# Altium PCB PCB1.PcbDoc
Units mil, origin at the board's own origin, x right, y up, seen from the top; angles counter-clockwise.
Board outline 6000 x 4000 mil, 2 copper layers (Top Layer, Bottom Layer); 10 components, 6 nets, 40 pads, 0 vias.
Unrouted connection lines stored in the file: 34.
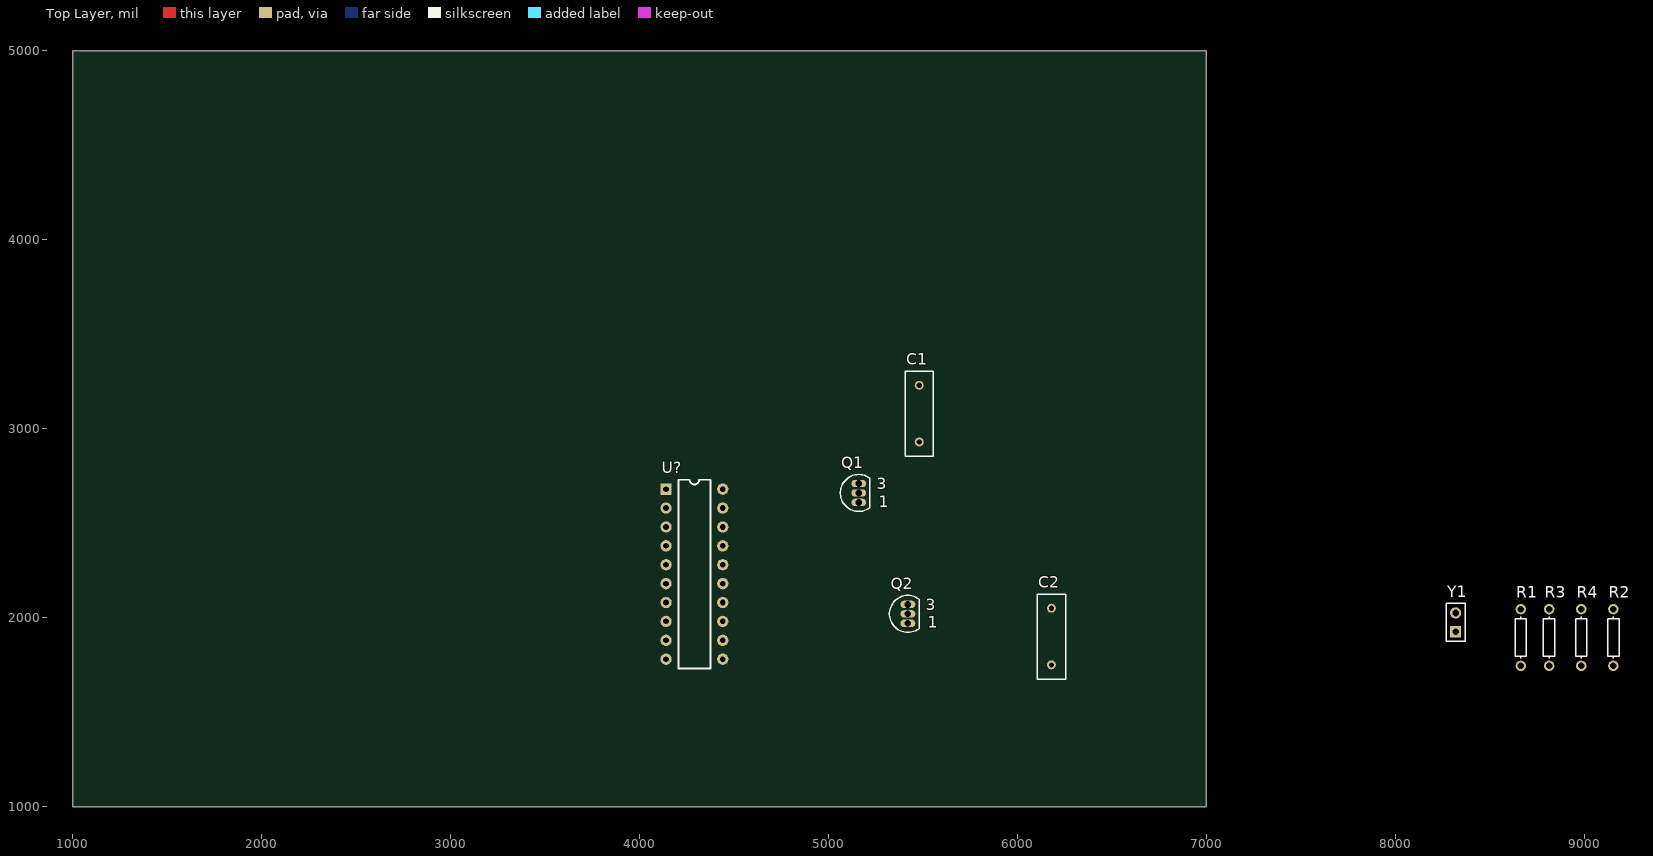
[diagram p0: Top Layer view]
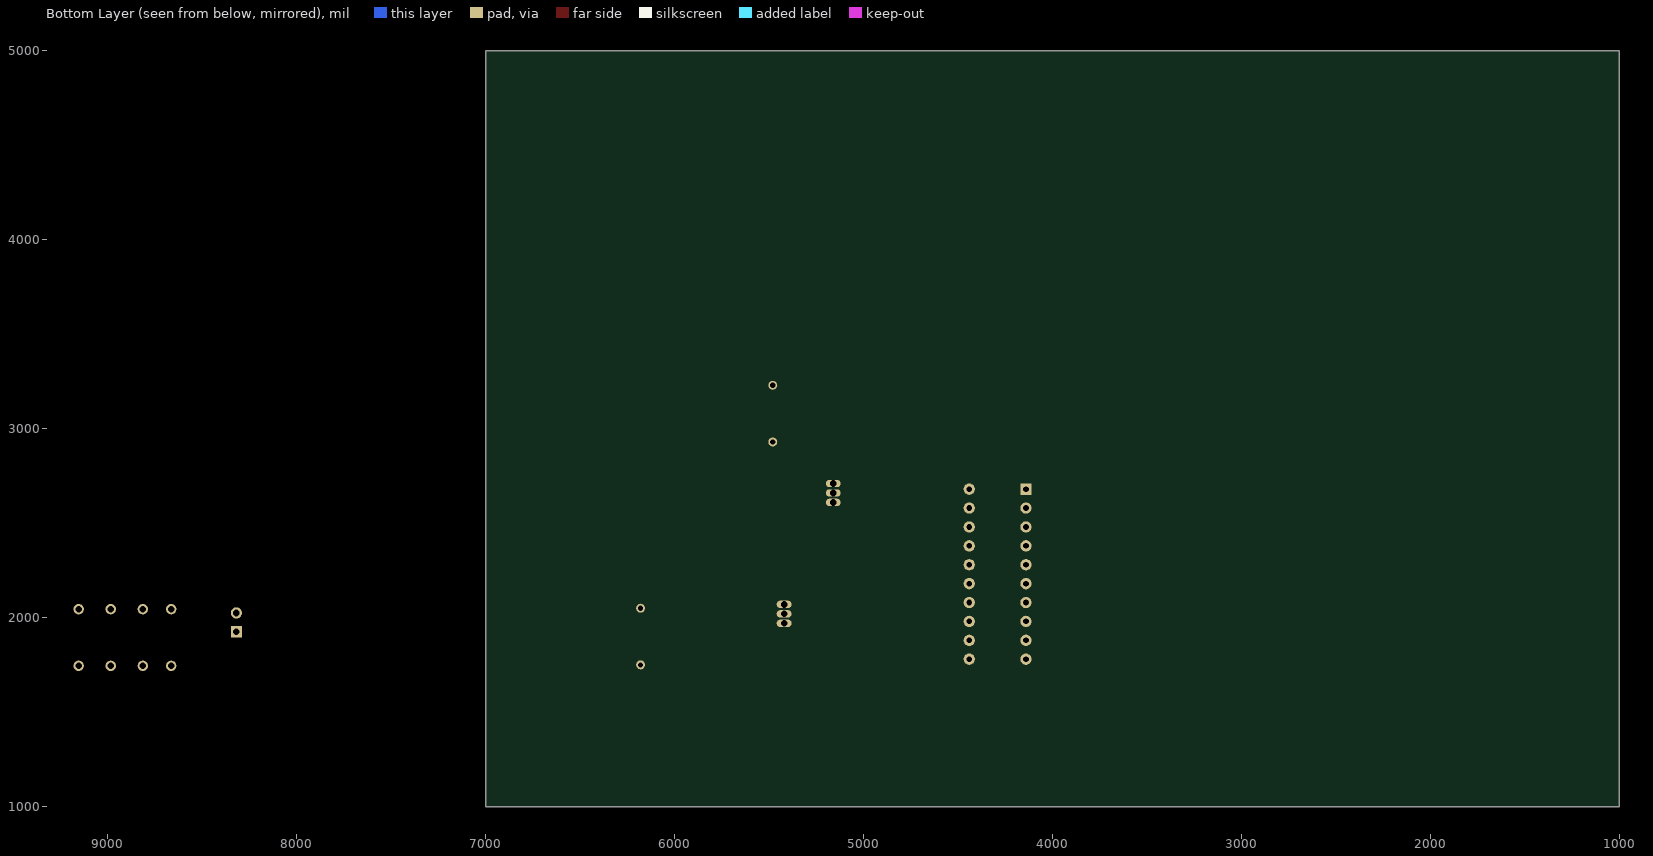
[diagram p1: Bottom Layer view, seen from below]

## Layer stack, top to bottom
Top Layer: signal copper 1.4
Dielectric: dielectric 12.6, FR-4, Dk 4.8
Bottom Layer: signal copper 1.4

## Board outline
1000,1000 7000,1000 7000,5000 1000,5000

## Design rules (kind name [scope] priority, off if disabled: settings)
Clearance [All] p1: gap=10
PolygonConnect [All] p1: connectstyle=Relief reliefconductorwidth=10 reliefentries=4 polygonreliefangle="90 Angle"
RoomDefinition Multivibrator [InComponentClass('Multivibrator')] p1: confinementstyle=ConfineIn formatcopy=TRUE lockcomponents=FALSE outline 7045,1065 9250,1065 9250,2185 7045,2185
RoutingVias [All] p1: holewidth=28 width=50 viastyle="Through Hole" minholewidth=28 minwidth=50 maxholewidth=28 maxwidth=50
SilkscreenOverComponentPads [All] p1: minsilkscreentomaskgap=10
SolderMaskExpansion [All] p1: expansion=4
TestPointUsage [All] p1: valid=0 allowmultiple=FALSE
Testpoint [All] p1: side=15 testpointundercomponent=TRUE minsize=40 maxsize=100 preferedsize=60 minholesize=0 maxholesize=40 preferedholesize=32 testpointgrid=1 style=1023 order=0123456789
Width [All] p1: maxlimit=10 minlimit=10 preferedwidth=10
23 further rules are at their usual default settings.

## Components (designator, comment, footprint, x,y, rotation, side; value= is the part's Value field where it differs from the comment)
C1 "20nF" RAD-0.3 5480,3080 r90 top
C2 "20nF" RAD-0.3 6180,1900 r90 top
Q1 "2N3904" TO-92A 5160,2660 r0 top
Q2 "2N3904" TO-92A 5420,2020 r0 top
R1 "100K" AXIAL-0.3 8665,1895 r90 top
R2 "100K" AXIAL-0.3 9155,1895 r90 top
R3 "1K" AXIAL-0.3 8815,1895 r90 top
R4 "1K" AXIAL-0.3 8985,1895 r90 top
U? "AT89C2051" DIP20 4140,2680 r0 top
Y1 "Header 2" HDR1X2 8320,1925 r90 top

## Footprints (in the part's own frame and the unit in brackets; to place one, negate y for a bottom-side part, rotate by r counter-clockwise, add the part's x,y. Pads: shape width x height; smd on the part's side, far side on the other; paste and mask are expansions set on the pad)
AXIAL-0.3 [mm] "Resistor; 2 Leads"
  round 1.4 hole 0.85: 1(-3.81,0) 2(3.81,0)
  silkscreen extent -2.77,-0.76 2.77,0.76
DIP20 [mil]
  rect 60x60 hole 30: 1(0,0)
  round 60 hole 30: 2(0,-100) 3(0,-200) 4(0,-300) 5(0,-400) 6(0,-500) 7(0,-600) 8(0,-700) 9(0,-800) 10(0,-900) 11(300,-900) 12(300,-800) 13(300,-700) 14(300,-600) 15(300,-500) 16(300,-400) 17(300,-300) 18(300,-200) 19(300,-100) 20(300,0)
  silkscreen extent 65,-950 235,50
HDR1X2 [mm] "Connector; Header; 2 Position"
  rect 1.5x1.5 hole 0.9: 1(0,0)
  round 1.5 hole 0.9: 2(2.54,0)
  silkscreen extent -1.27,-1.27 3.81,1.27
RAD-0.3 [mm] "Capacitor; 2 Leads"
  round 1.2 hole 0.7: 1(-3.81,0) 2(3.81,0)
  silkscreen extent -5.71,-1.91 5.71,1.91
TO-92A [mm] "TO, Flat Index; 3 In-Line, Axial Leads; Body Dia. 4.5mm; Leads 0.51 x 0.48 mm (max)"
  oval 2x1 hole 0.9: 1(0,-1.27) 2(0,0) 3(0,1.27)
  silkscreen extent -2.48,-2.48 1.5,2.48

## Part data
C1 C2: library part Cap, "Capacitor"
Q1 Q2: "NPN General Purpose Amplifier"
R1 R2 R3 R4: library part Res1, "Resistor"
U?: "单片机AT89C2051"
Y1: "Header, 2-Pin"

## Nets (pads, with @x,y where several pads share a name; then routed paths per layer and width w, separated by ;. In a path a pad name is that pad's centre, name@x,y a point inside that pad or via, vN(x,y) a via of type N, cw(c..) or ccw(c..) an arc to the next point about the centre after c; other vN are vias at no path point)
+12V: R1.2 R2.2 R3.2 R4.2 Y1.1
GND: Q1.1 Q2.1 U?.1 U?.2 U?.3 U?.6 U?.7 U?.8 U?.9 U?.11 U?.20 Y1.2
NetC1_1: C1.1 Q1.2 R1.1
NetC1_2: C1.2 Q2.3 R4.1
NetC2_1: C2.1 Q1.3 R3.1
NetC2_2: C2.2 Q2.2 R2.1 U?.4 U?.5 U?.10 U?.12 U?.13 U?.14 U?.15 U?.16 U?.17 U?.18 U?.19

## Text inside footprints (layer, text, board x,y; h text height)
Q1: Top Overlay "1" at 5264.72,2585.2 h59.05; Top Overlay "3" at 5255.67,2680.08 h59.05
Q2: Top Overlay "1" at 5524.72,1945.2 h59.05; Top Overlay "3" at 5515.67,2040.08 h59.05